# Altium PCB PCB1.PcbDoc
Units mil, origin at the board's own origin, x right, y up, seen from the top; angles counter-clockwise.
Board outline 6000 x 4000 mil, 2 copper layers (Top Layer, Bottom Layer); 60 components, 62 nets, 237 pads, 6 vias.
Unrouted connection lines stored in the file: 5.
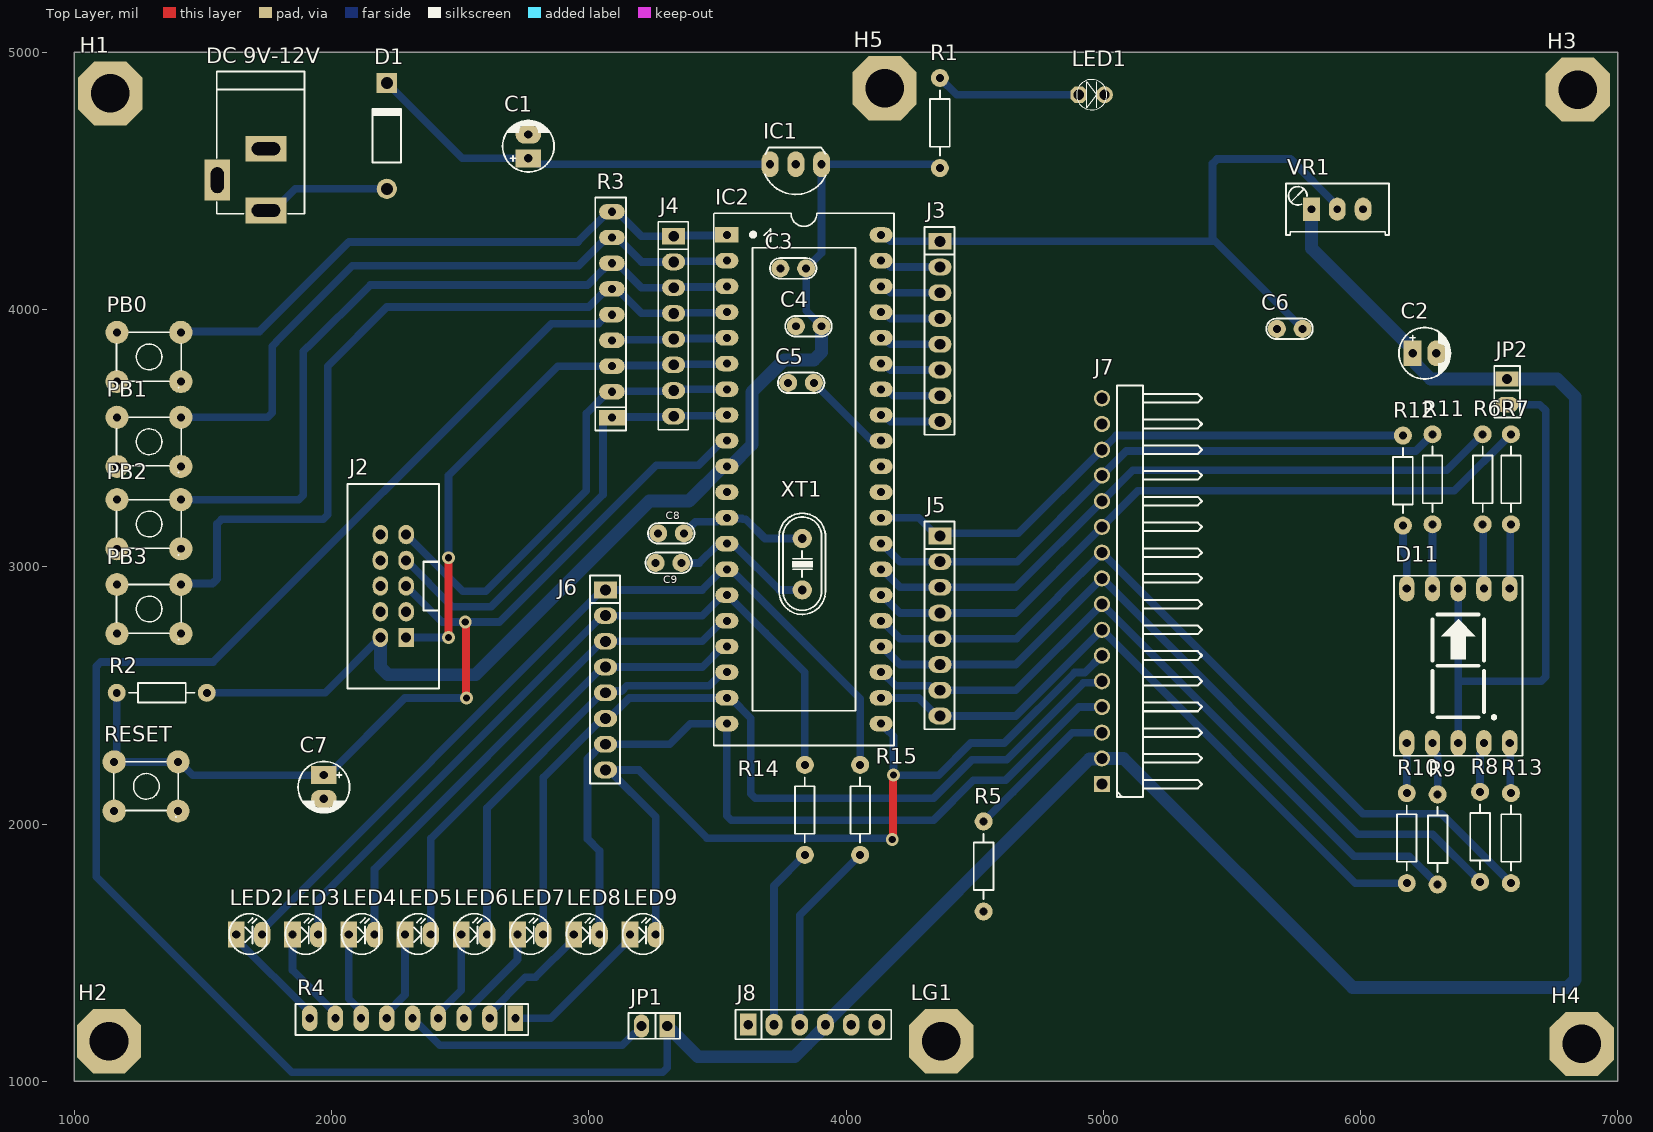
[diagram p0: Top Layer view]
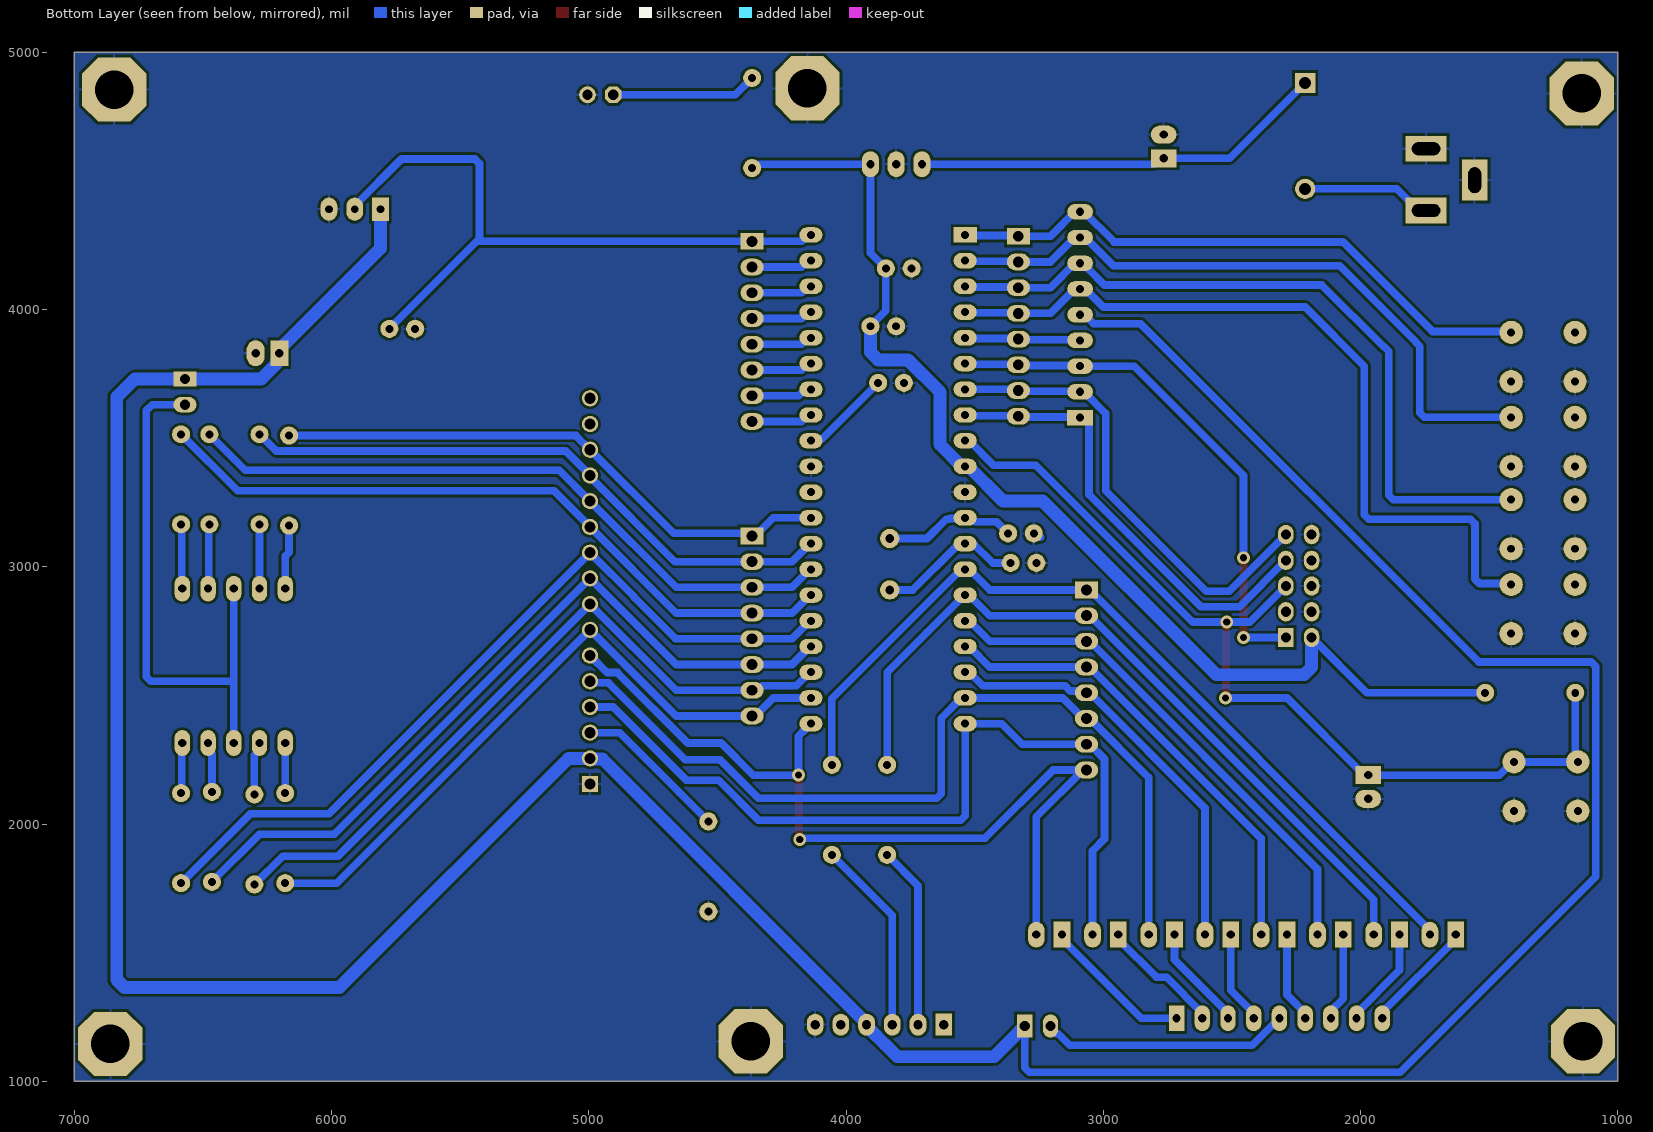
[diagram p1: Bottom Layer view, seen from below]
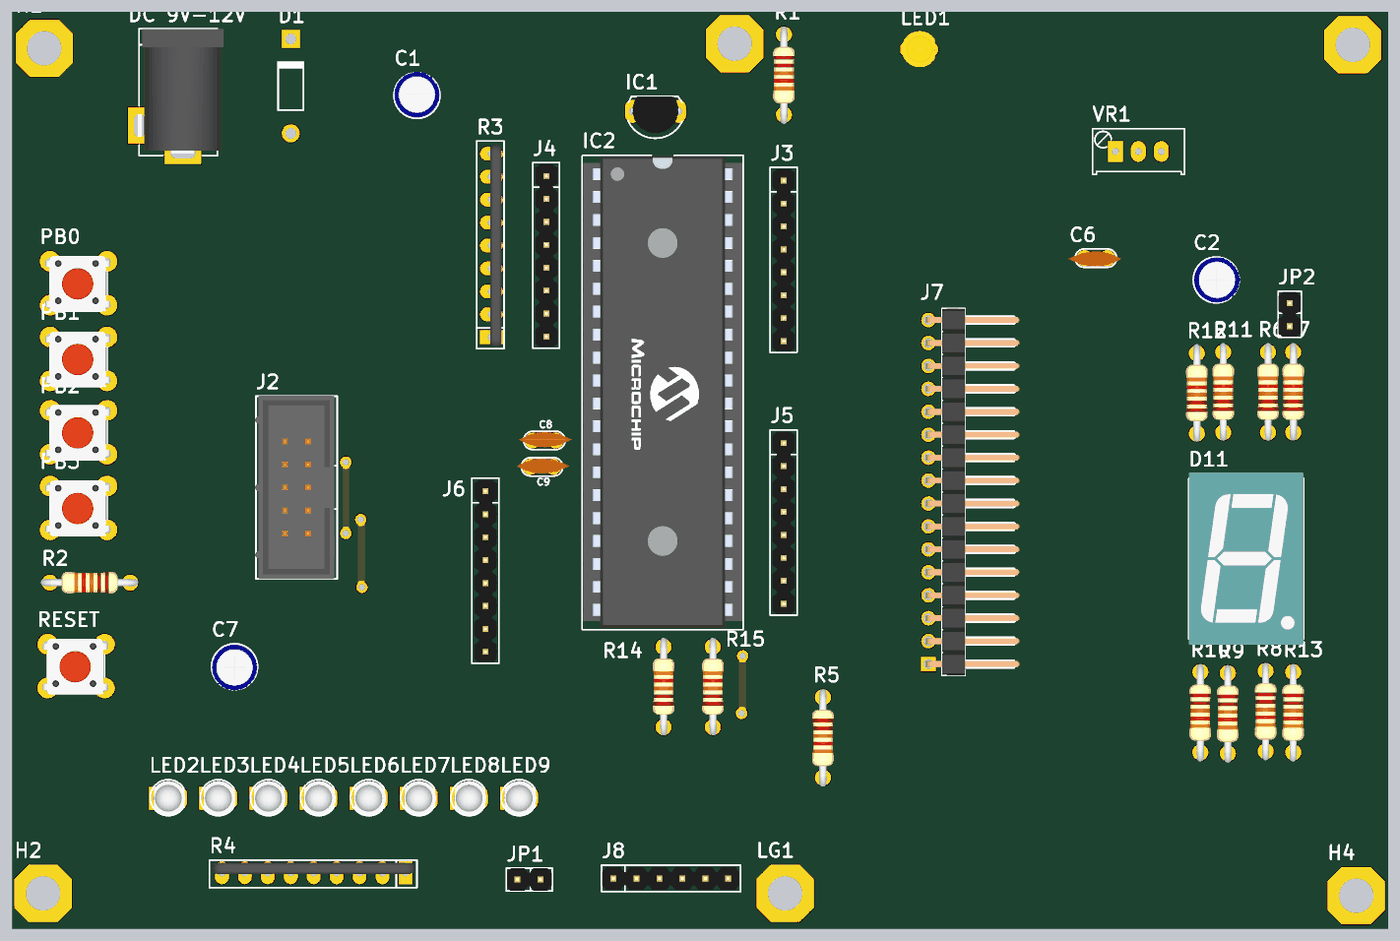
[diagram p2: 3D render of the assembled board from above, using the file's embedded part models]

## Layer stack, top to bottom
Top Solder: solder mask 0.4, Solder Resist, Dk 3.5
Top Layer: signal copper 1.4
Dielectric 1: dielectric 12.6, FR-4, Dk 4.8
Bottom Layer: signal copper 1.4
Bottom Solder: solder mask 0.4, Solder Resist, Dk 3.5

## Board outline
1000,1000 7000,1000 7000,5000 1000,5000

## Design rules (kind name [scope] priority, off if disabled: settings)
Clearance [All] p1: gap=10 ignorepadtopadclearanceinfootprint=FALSE except(0: Arc-Hole Track-Hole SMDPad-Hole THPad-Hole Via-Hole Fill-Hole Poly-Hole Region-Hole Text-Hole)
PolygonConnect [All] p1: connectstyle=Relief reliefconductorwidth=10 reliefentries=4 polygonreliefangle="90 Angle" airgapwidth=10
RoutingVias [All] p1: holewidth=0.4 width=0.8 viastyle="Through Hole" minholewidth=0.4 minwidth=0.8 maxholewidth=0.4 maxwidth=0.8
SolderMaskExpansion [All] p1: expansion=4 istentingtop=FALSE
Width [All] p1: maxlimit=50 minlimit=10 preferedwidth=30 minimp=50.000000 maximp=50.000000 favimp=50.000000
30 further rules are at their usual default settings.

## Components (designator, comment, footprint, x,y, rotation, side; value= is the part's Value field where it differs from the comment)
C1 "1000u" CP1/2 2765,4587.87 r90 top value=10uF/50V
C2 "1000u" CP1/2 6202.87,3830 r0 top value=10uF/50V
C3 "100n" CN1 3845,4160 r180 top value=100pF
C4 "100n" CN1 3905,3935 r180 top value=100pF
C5 "100p" CN1 3775,3715 r0 top value=100pF
C6 "100n" CN1 5775,3925 r180 top value=100pF
C7 "10uF" CP1/2 1970,2190 r270 top value=10uF/50V
C8 "22p" CN1 3270,3130 r0 top value=100pF
C9 "22p" CN1 3260,3015 r0 top value=100pF
D1 "1N4007" DO-41 2215,4675 r90 top
D11 "7SEG S" 7SEGS 6180,2315 r0 top value="LED 7S SEG"
"DC 9V-12V" "Jack DC 12V" DC-IN 1745,4625 r270 top
H1 "1" VIT 1140,4840 r0 top
H2 "1" VIT 1135,1155 r0 top
H3 "1" VIT 6845,4855 r0 top
H4 "1" VIT 6860,1145 r0 top
H5 "1" VIT 4150,4860 r0 top
IC1 "LM7805" 78l05 3805,4565 r180 top
IC2 "ATMEL 16L" DIP40/W0.6 3536.56,4290 r270 top value="Atmega 16L"
J2 "Prog." ISP 2290,2725 r270 top
J3 "PA" JP8 4365,4265 r270 top value=JP7
J4 "PB" JP8 3330,4285 r270 top value=JP7
J5 "PC" JP8 4365,3120 r270 top value=JP7
J6 "PD" JP8 3065,2910 r270 top value=JP7
J7 "JP16" JP16-D1C 5095,3705 r90 top
J8 "JP6" JP6 3620,1220 r0 top value=JP7
JP1 "Jumper 2" JP2 3305,1215 r180 top value="JP 2"
JP2 "Jumper 2" JP2 6570,3730 r270 top value="JP 2"
LED1 "LED" LED-3MM-YELLOW 4905,4835 r0 top value="LED 3 ly Single Colour"
LED2 "LED" LED-3 1680,1570 r0 top value="LED 3 ly Single Colour"
LED3 "LED" LED-3 1898.57,1570 r0 top value="LED 3 ly Single Colour"
LED4 "LED" LED-3 2117.14,1570 r0 top value="LED 3 ly Single Colour"
LED5 "LED" LED-3 2335.71,1570 r0 top value="LED 3 ly Single Colour"
LED6 "LED" LED-3 2554.29,1570 r0 top value="LED 3 ly Single Colour"
LED7 "LED" LED-3 2772.86,1570 r0 top value="LED 3 ly Single Colour"
LED8 "LED" LED-3 2991.43,1570 r0 top value="LED 3 ly Single Colour"
LED9 "LED" LED-3 3210,1570 r0 top value="LED 3 ly Single Colour"
LG1 "1" VIT 4370,1155 r0 top
PB0 "B1" SW4 1290,3815 r0 top value="Button chip 4 pin"
PB1 "B2" SW4 1290,3485 r0 top value="Button chip 4 pin"
PB2 "B3" SW4 1290,3165 r0 top value="Button chip 4 pin"
PB3 "B4" SW4 1290,2835 r0 top value="Button chip 4 pin"
R1 "1k" R1/4W 4365,4550 r90 top value="R1/4W - 1K"
R2 "10k" R1/4W 1165,2510 r0 top value="R1/4W - 1K"
R3 "10k" RN8 3090,3580 r90 top value=10K
R4 "1k" RN8 2715,1245 r180 top value=10K
R5 "1k" R1/4W 4535,1660 r90 top value="R1/4W - 1K"
R6 "1k" R1/4W 6475,3515 r270 top value="R1/4W - 1K"
R7 "1k" R1/4W 6585,3515 r270 top value="R1/4W - 1K"
R8 "1k" R1/4W 6465,1775 r90 top value="R1/4W - 1K"
R9 "1k" R1/4W 6300,1765 r90 top value="R1/4W - 1K"
R10 "1k" R1/4W 6180,1770 r90 top value="R1/4W - 1K"
R11 "1k" R1/4W 6280,3515 r270 top value="R1/4W - 1K"
R12 "1k" R1/4W 6165,3510 r270 top value="R1/4W - 1K"
R13 "1k" R1/4W 6585,1770 r90 top value="R1/4W - 1K"
R14 "100" R1/4W 3840,2230 r270 top value="R1/4W - 1K"
R15 "100" R1/4W 4055,2230 r270 top value="R1/4W - 1K"
RESET "Reset" SW4 1279.12,2145.44 r0 top value="Button chip 4 pin"
VR1 "50K" VR-S3 5810,4390 r0 top value="Volume 50k"
XT1 "10Mhz" XT2 3830,3010 r270 top value=4Mhz

## Footprints (in the part's own frame and the unit in brackets; to place one, negate y for a bottom-side part, rotate by r counter-clockwise, add the part's x,y. Pads: shape width x height; smd on the part's side, far side on the other; paste and mask are expansions set on the pad)
7SEGS [mil] "DIP 10 Leads; Body 12 x 15 mm; Pitch 0.5 mm"
  oval 60x100 hole 32: 1(0,0) 2(100,0) 3(200,0) 4(300,0) 5(400,0) 6(400,600) 7(300,600) 8(200,600) 9(100,600) 10(0,600)
  silkscreen extent -50,-50 450,650, body extent -50,-75 450,675, height 316
78l05 [mil]
  oval 66x100 hole 32: 1(100,0) 2(0,0) 3(-100,0)
  silkscreen extent -117,-65 120,118, body extent -109,-66 109,95, height 245
CN1 [mil]
  round 70 hole 31: 1(0,0) 2(100,0)
  silkscreen extent -40,-40 141,40, body extent -60,-30 170,37, height 265
CP1/2 [mil] "Tu hoa < 22uF/16>50V"
  rect 70x100 hole 32: 1(0,0)
  oval 70x100 hole 32: 2(92.13,0)
  silkscreen extent -53,-100 146,100, body extent -49,-99 149,99, height 287
DC-IN [mil] "Jac DC input"
  rect 100x160 hole 50 slot 110.24 at 90 deg: 1(240.16,0) 2(0,0)
  rect 160x100 hole 50 slot 100 at 0 deg: 3(122.05,-188.98)
  silkscreen extent -300,-191 253,150, body extent -299,-198 245,176, height 434
DIP40/W0.6 [mil] "40 PIN, W 600mil, Pin to pin 100mil"
  rect 60x90 hole 31: 1(0,0)
  oval 60x90 hole 31: 2(100,0) 3(200,0) 4(300,0) 5(400,0) 6(500,0) 7(600,0) 8(700,0) 9(800,0) 10(900,0) 11(1000,0) 12(1100,0) 13(1200,0) 14(1300,0) 15(1400,0) 16(1500,0) 17(1600,0) 18(1700,0) 19(1800,0) 20(1900,0) 21(1900,600) 22(1800,600) 23(1700,600) 24(1600,600) 25(1500,600) 26(1400,600) 27(1300,600) 28(1200,600) 29(1100,600) 30(1000,600) 31(900,600) 32(800,600) 33(700,600) 34(600,600) 35(500,600) 36(400,600) 37(300,600) 38(200,600) 39(100,600) 40(0,600)
  silkscreen extent -84,-51 1985,650, body extent -80,-47 1977,646, height 327
DO-41 [mm] "Diode, Axial; Body 5.2 x 2.7 mm (LxDia. max), Lead Dia. 0.86 mm (max)"
  round 2 hole 1.2: 1(-5.23,0)
  rect 2x2 hole 1.2: 2(5.23,0)
  silkscreen extent -2.65,-1.4 2.75,1.4
ISP [mil]
  rect 75x60 hole 39.37 mask+8: 1(0,0)
  oval 75x60 hole 39.37 mask+8: 2(0,-100) 3(-100,0) 4(-100,-100) 5(-200,0) 6(-200,-100) 7(-300,0) 8(-300,-100) 9(-400,0) 10(-400,-100)
  silkscreen extent -598,-227 198,127, body extent -600,-231 200,117, height 363
JP2 [mil]
  rect 60x90 hole 39.37: 1(0,0)
  oval 60x90 hole 39.37: 2(100,0)
  silkscreen extent -50,-50 150,50, body extent -48,-50 148,48, height 323
JP6 [mil] "JP6"
  rect 65x85 hole 36: 1(0,0)
  oval 65x85 hole 36: 2(100,0) 3(200,0) 4(300,0) 5(400,0) 6(500,0)
  silkscreen extent -50,-57 556,58, body extent -48,-50 548,48, height 323
JP8 [mil] "JP8"
  rect 65x90 hole 42: 1(0,0)
  oval 65x90 hole 42: 2(100,0) 3(200,0) 4(300,0) 5(400,0) 6(500,0) 7(600,0) 8(700,0)
  silkscreen extent -56,-60 752,57, body extent -48,-50 748,48, height 323
JP16-D1C [mm] "16 pins, 1 row, right angled, gold plating"
  rect 1.6x1.6 hole 1.1: 1(-39.37,2.54)
  round 1.6 hole 1.1: 2(-36.83,2.54) 3(-34.29,2.54) 4(-31.75,2.54) 5(-29.21,2.54) 6(-26.67,2.54) 7(-24.13,2.54) 8(-21.59,2.54) 9(-19.05,2.54) 10(-16.51,2.54) 11(-13.97,2.54) 12(-11.43,2.54) 13(-8.89,2.54) 14(-6.35,2.54) 15(-3.81,2.54) 16(-1.27,2.54)
  silkscreen extent -40.64,-7.34 0,1.04, body extent -40.64,-7.52 0,2.84, height 2.55
LED-3 [mil] "LED 2 PIN, 3ly Only colour"
  rect 65x100 hole 32: 1(-50,0)
  oval 65x100 hole 32: 2(50,0)
  silkscreen extent -78,-76 69,81, body extent -62,-75 76,75, height 217
LED-3MM-YELLOW [mil]
  oct 65x65 hole 40: 1(0,0)
  round 65 hole 40: 2(100,0)
  silkscreen extent -9,-59 109,59, body extent -27,-77 117,80, height 181
R1/4W [mil] "R 1/4W, 2 Pin, 350mil"
  round 70 hole 31: 1(0,0) 2(350,0)
  silkscreen extent 48,-38 302,38, body extent -40,-47 386,47, height 111
RN8 [mil] "R SIP8, 9 Pin"
  rect 60x100 hole 32: 1(0,0)
  oval 60x100 hole 32: 2(100,0) 3(200,0) 4(300,0) 5(400,0) 6(500,0) 7(600,0) 8(700,0) 9(800,0)
  silkscreen extent -50,-55 855,65, body extent -43,-44 843,5, height 259
SW4 [mil] "SW button 4pin, 250 x250 mil"
  round 90 hole 31: 1(-124,-95) 2(124,96) 3(124,-95) 4(-124,96)
  silkscreen extent -126,-119 125,96, body extent -160,-124 152,120, height 276
VIT [mil] "VIT"
  oct 250x250 hole 150: VIT1(0,0)
VR-S3 [mil] "Variable Resistor"
  rect 65x90 hole 30: 1(0,0)
  oval 65x90 hole 30: 2(100,0) 3(200,0)
  silkscreen extent -100,-100 301,100, body extent -91,-98 291,90, height 430
XT2 [mil] "Footpin for Crystal 2 pin"
  round 75 hole 34: 1(-100,0) 2(100,0)
  silkscreen extent -198,-90 195,90, body extent -233,-93 213,90, height 138

## Part data
C1 C2 C7: library part CP1, "Cap P  0,1uF < 22uF , 16 - 50V", Description 1="10 => 220uF/6,3V/10V - 10uF => 100uF/16V", Description 2="0,1uF => 33uF/50V - 10uF => 22uF/63V", Description 3="0,47uF => 10uF/100V"
C3 C4 C5 C6 C8 C9: library part CN1, "Cap np  1pF - 472pF"
D1: library part "Diode 1N4007", "1 Amp General Purpose Rectifier", Code_JEDEC=DO-204-AL, ComponentLink1Description="Manufacturer Link", ComponentLink1URL=http://www.fairchildsemi.com/, ComponentLink2Description=Datasheet, ComponentLink2URL=http://www.fairchildsemi.com/ds/1N%2F1N4001.pdf, DatasheetVersion=1998, LatestRevisionDate=17-Jul-2002, LatestRevisionNote="Re-released for DXP Platform.", PackageDescription="Diode, Axial; Body 5.2 x 2.7 mm (LxDia. max), Lead Dia. 0.86 mm (max)", PackageReference=DO-41, PackageVersion=Aug-1999, Published=8-Jun-2000, Publisher="Altium Limited"
D11: library part LED7S, "Single 7 Seg Dipslay"
"DC 9V-12V": library part Jac_DC, "Cắm", Chung_Loai=Cắm, Don_Vi=Con, Ma_Hang=MH000923, Ten_Linh_Kien="Jack DC5.5x2.1MM DC5501"
H1 H2 H3 H4 H5 LG1: library part VIT, "Oc Vit"
IC1: library part LM78xx, "On ap +, from + 5 to + 24VDC"
IC2: library part Atmega16L, "8-Bit AVR Microcontroller with 16K Bytes of In-System Programmable Flash Memory"
J2: library part ISP
J3 J4 J5 J6: library part JP8, "JP8 PIN"
J7: "WR-PHD 2.54 mm Angled Socket Header", Manufacturer="W¨¹rth Elektronik eiSos GmbH", partNo=613016143121, ComponentLink1 Description=Manufacturer, ComponentLink1URL=http://www.we-online.com, ComponentLink2 Description=Datasheet, ComponentLink2URL=http://katalog.we-online.de/em/datasheet/6130xx143121.pdf, Created by="Karrer Zheng", Created Date="29 March 2013", NoPins=16
J8: "JP6 PIN"
JP1 JP2: library part "JP 2"
LED1 LED2 LED3 LED4 LED5 LED6 LED7 LED8 LED9: "LED Single colour Green and Red"
PB0 PB1 PB2 PB3 RESET: library part SW4, "Switch button 4 pin"
R1 R2 R5 R6 R7 R8 R9 R10 R11 R12 R13 R14 R15: library part R1/4W, "Resistor 1/4W"
R3 R4: library part RKC8LD, "Resistor Pack 4x2"
VR1: library part VR-S, "Var Resistor"
XT1: library part XT2, "Crystal For all Crystal 2pin."

## Via types
v1: diameter 50, hole 28, Top Layer to Bottom Layer, 6 vias

## Nets (pads, with @x,y where several pads share a name; then routed paths per layer and width w, separated by ;. In a path a pad name is that pad's centre, name@x,y a point inside that pad or via, vN(x,y) a via of type N, cw(c..) or ccw(c..) an arc to the next point about the centre after c; other vN are vias at no path point)
AVR_RX: IC2.14 J6.1 LED2.2 R15.1 | length 3388.5
  Bottom Layer w30: LED2.2 1730,1587.5 3052.5,2910 J6.1 3441.56,2910 3521.56,2990 IC2.14 3551.56,2990 4055,2486.56 R15.1
AVR_TX: IC2.15 J6.2 LED3.2 R14.1 | length 3002.2
  Bottom Layer w30: LED3.2 1948.57,1706.07 3052.5,2810 J6.2 3441.56,2810 3521.56,2890 IC2.15 3540,2890 3687.87,2742.13 3840,2590 R14.1
GND: "DC 9V-12V.2" "DC 9V-12V.3" C1.2 C2.2 C3.2 C4.2 C5.1 C6.2 C7.2 C8.1 C9.1 H1.VIT1 H2.VIT1 H3.VIT1 H4.VIT1 H5.VIT1 IC1.2 IC2.11 IC2.31 J2.4 J2.6 J2.8 J2.10 J7.1 J8.6 LED1.2 LG1.VIT1 PB0.1 PB0.3 PB1.1 PB1.3 PB2.1 PB2.3 PB3.1 PB3.3 R5.1 RESET.1 RESET.3 VR1.3 | length 82.4
  Bottom Layer w30: PB2.3 PB2.3@1419,3065 ; J2.10 J2.10@2190,3132.5 ; C8.1@3244.18,3115 3259.18,3130 C8.1 ; C5.1 C5.1@3775,3725.82 ; J8.6 J8.6@4120,1237.5 ; R5.1@4535,1652.5 R5.1
MISO: IC2.7 J2.9 J4.7 R3.2 | length 1827.3
  Bottom Layer w30: J2.9 2510,2905 2600,2905 2990,3295 2990,3595.42 3074.58,3680 R3.2 3092.5,3682.5 3327.5,3682.5 3335,3690 IC2.7@3525,3690
MOSI: IC2.6 J2.1 J4.6 R3.3 | length 2066.7
  Top Layer w30: v1(2455,2725) v1(2455,3035)
  Bottom Layer w30: J2.1 v1(2455,2725) ; v1(2455,3035) 2455,3355 2880,3780 R3.3 3092.5,3782.5 3327.5,3782.5 J4.6 3332.5,3787.5 3515,3787.5 3534.06,3787.5 IC2.6 ; IC2.6@3515,3790 IC2.6@3525,3790
NetC1_1: C1.1 D1.2 IC1.1 | length 1620.9
  Bottom Layer w30: D1.2 2508.03,4587.87 C1.1 2780,4587.87 2802.87,4565 IC1.1
NetC5_2: C5.2 IC2.32 | length 354.8
  Bottom Layer w30: C5.2 4094.26,3495.74 4130.82,3495.74 IC2.32
NetC8_2: C8.2 IC2.12 XT1.1 | length 500
  Bottom Layer w30: C8.2 3415,3175 3498.44,3175 3513.44,3190 IC2.12 ; IC2.12@3553.65,3187.91 3595.53,3187.91 3598.44,3185 3610,3185 3685,3110 XT1.1
NetC9_2: C9.2 IC2.13 XT1.2 | length 575.6
  Bottom Layer w30: C9.2 3430,3015 3499.26,3084.26 3530.82,3084.26 IC2.13 3559.68,3090 3574.68,3075 3575,3075 3740,2910 XT1.2
NetD1_1: "DC 9V-12V.1" D1.1 | length 504.9
  Bottom Layer w30: 1745,4384.84 1775,4384.84 1859.25,4469.09 D1.1
NetD11_1: D11.1 R10.2 | length 195
  Bottom Layer w30: R10.2 D11.1
NetD11_2: D11.2 R9.2 | length 208.3
  Bottom Layer w30: D11.2 6280,2286.88 6300,2266.88 R9.2
NetD11_3: D11.3 D11.8 JP2.2 | length 2141.5
  Bottom Layer w30: D11.3 6380,2555 ; D11.8 6380,2555 ; JP2.2 6697.43,3630 6720,3607.43 6720,2572.57 6702.43,2555 6380,2555
NetD11_4: D11.4 R8.2 | length 196.2
  Bottom Layer w30: R8.2 6465,2271.88 6480,2286.88 D11.4
NetD11_5: D11.5 R13.2 | length 197.1
  Bottom Layer w30: D11.5 6582.5,2312.5 6582.5,2122.5 R13.2
NetD11_6: D11.6 R7.2 | length 252.1
  Bottom Layer w30: D11.6 6582.5,2917.5 6582.5,3162.5 R7.2
NetD11_7: D11.7 R6.2 | length 252.1
  Bottom Layer w30: R6.2 6477.5,3162.5 6477.5,2917.5 D11.7
NetD11_9: D11.9 R11.2 | length 250
  Bottom Layer w30: D11.9 R11.2
NetD11_10: D11.10 R12.2 | length 251.2
  Bottom Layer w30: R12.2 6165,3056.52 6180,3041.52 D11.10
NetJ7_3: J7.3 R5.2 | length 602.9
  Bottom Layer w30: R5.2 4649.64,2124.64 4660,2135 4880,2355 J7.3
NetJ8_2: J8.2 R14.2 | length 709.7
  Bottom Layer w30: J8.2 3720,1760 R14.2
NetJ8_3: J8.3 R15.2 | length 757.3
  Bottom Layer w30: J8.3 3820,1645 R15.2
NetJP1_2: JP1.2 R4.5 | length 975.7
  Bottom Layer w30: R4.5 2315,1233.12 2328.86,1219.26 2340.74,1219.26 2420.18,1139.82 3129.82,1139.82 3175,1185 3181.88,1185 3205,1208.12 JP1.2
NetLED1_1: LED1.1 R1.2 | length 566.9
  Bottom Layer w30: R1.2 4430,4835 LED1.1
NetLED2_1: LED2.1 R4.9 | length 443.1
  Bottom Layer w30: LED2.1 1630,1552.5 1915,1267.5 R4.9
NetLED3_1: LED3.1 R4.8 | length 393.9
  Bottom Layer w30: LED3.1 1848.57,1431.43 2015,1265 R4.8
NetLED4_1: LED4.1 R4.7 | length 344.8
  Bottom Layer w30: LED4.1 2067.14,1320.98 2115,1273.12 R4.7
NetLED5_1: LED5.1 R4.6 | length 354.3
  Bottom Layer w30: R4.6 2215,1265 2285.71,1335.71 LED5.1
NetLED6_1: LED6.1 R4.4 | length 362
  Bottom Layer w30: R4.4 2415,1265 2504.29,1354.29 LED6.1
NetLED7_1: LED7.1 R4.3 | length 411.1
  Bottom Layer w30: R4.3 2515,1265 2722.86,1472.86 LED7.1
NetLED8_1: LED8.1 R4.2 | length 483
  Bottom Layer w30: R4.2 2615,1265 2753.74,1403.74 2792.67,1403.74 2941.43,1552.5 LED8.1
NetLED9_1: LED9.1 R4.1 | length 589.9
  Bottom Layer w30: R4.1 2852.5,1245 3160,1552.5 LED9.1
PA0: C6.1 IC2.40 J3.1 VR1.2 | length 2699.2
  Bottom Layer w30: IC2.40@4125,4290 4148.12,4290 4173.12,4265 J3.1 5435,4265 ; C6.1@5775,3935.82 C6.1 5435,4265 ; VR1.2 5910,4402.86 5727.86,4585 5442.57,4585 5425,4567.43 5425,4275 5435,4265
PA1: IC2.39 J3.2 | length 250.4
  Bottom Layer w30: IC2.39@4125,4190 4148.12,4190 4173.12,4165 J3.2
PA2: IC2.38 J3.3 | length 250.4
  Bottom Layer w30: IC2.38@4125,4090 4148.12,4090 4173.12,4065 J3.3
PA3: IC2.37 J3.4 | length 250.4
  Bottom Layer w30: IC2.37@4125,3990 4148.12,3990 4173.12,3965 J3.4
PA4: IC2.36 J3.5 | length 250.4
  Bottom Layer w30: IC2.36@4125,3890 4148.12,3890 4173.12,3865 J3.5
PA5: IC2.35 J3.6 | length 250.4
  Bottom Layer w30: IC2.35@4125,3790 4148.12,3790 4173.12,3765 J3.6
PA6: IC2.34 J3.7 | length 238.8
  Bottom Layer w30: IC2.34 4159.13,3690 4184.13,3665 J3.7
PA7: IC2.33 J3.8 | length 250.4
  Bottom Layer w30: IC2.33@4125,3590 4148.12,3590 4173.12,3565 J3.8
PB0: IC2.1 J4.1 PB0.2 PB0.4 R3.9 | length 2358.2
  Bottom Layer w30: PB0.2 1418,3915 1720,3915 2067.83,4262.83 2957.83,4262.83 3075,4380 3110,4380 3205,4285 J4.1 3332.5,4287.5 3534.06,4287.5 IC2.1
PB1: IC2.2 J4.2 PB1.2 PB1.4 R3.8 | length 2629.8
  Bottom Layer w30: PB1.2 1752.43,3581 1770,3598.57 1770,3857.43 1785,3872.43 1785,3875 2080,4170 2960,4170 3070,4280 R3.8 3110,4280 3205,4185 J4.2 3332.5,4187.5 3501.88,4187.5 3534.06,4187.5 IC2.2 ; IC2.2@3501.88,4190 IC2.2@3525,4190
PB2: IC2.3 J4.3 PB2.2 PB2.4 R3.7 | length 2873.1
  Bottom Layer w30: PB2.2 1872.43,3261 1890,3278.57 1890,3837.43 1907.57,3855 1910,3855 2150,4095 2995,4095 3055,4155 3055,4156.88 3078.12,4180 3110,4180 3205,4085 J4.3 3332.5,4087.5 3534.06,4087.5 IC2.3
PB3: IC2.4 J4.4 PB3.2 PB3.4 R3.6 | length 3104
  Bottom Layer w30: PB3.2 1418,2935 1537.43,2935 1555,2952.57 1555,3167.43 1572.57,3185 1967.43,3185 1985,3202.57 1985,3780 2215,4010 3000,4010 3070,4080 3110,4080 3205,3985 J4.4 3332.5,3987.5 3534.06,3987.5 IC2.4
PB4: IC2.5 J4.5 R3.4 | length 460.7
  Bottom Layer w30: R3.4 3092.5,3882.5 3327.5,3882.5 J4.5 3332.5,3887.5 3515,3887.5 3534.06,3887.5 IC2.5 ; IC2.5@3515,3890 IC2.5@3525,3890
PC0: IC2.22 J5.8 J7.7 R10.1 | length 2630.8
  Bottom Layer w30: IC2.22@4125,2490 4282.5,2490 4352.5,2420 J5.8 4660,2420 J7.7 5980,1770 R10.1
PC1: IC2.23 J5.7 J7.8 R9.1 | length 2794.2
  Bottom Layer w30: IC2.23@4125,2590 4140,2590 4193.03,2536.97 4326.06,2536.97 4343.03,2520 J5.7 4660,2520 J7.8 5975,1875 6190,1875 R9.1
PC2: IC2.24 J5.6 J7.9 R8.1 | length 2996.5
  Bottom Layer w30: IC2.24@4125,2690 4140,2690 4210,2620 J5.6 4660,2620 J7.9 5990,1960 6280,1960 R8.1
PC3: IC2.25 J5.5 J7.10 R13.1 | length 3161.4
  Bottom Layer w30: IC2.25@4125,2790 4140,2790 4210,2720 J5.5 4662.43,2720 4823.32,2880.9 4823.32,2883.32 J7.10 6010,2040 6315,2040 R13.1
PC4: IC2.26 J5.4 J7.11 R7.1 | length 2776.9
  Bottom Layer w30: IC2.26@4125,2890 4140,2890 4210,2820 J5.4 4660,2820 J7.11 5135,3295 6365,3295 R7.1
PC5: IC2.27 J5.3 J7.12 R6.1 | length 2625.5
  Bottom Layer w30: IC2.27@4125,2990 4140,2990 4210,2920 J5.3 4660,2920 J7.12 5115,3375 6335,3375 R6.1
PC6: IC2.28 J5.2 J7.13 R11.1 | length 2392
  Bottom Layer w30: IC2.28@4125,3090 4140,3090 4210,3020 J5.2 4665,3020 4995,3350 J7.13 5090,3450 6215,3450 R11.1
PC7: IC2.29 J5.1 J7.14 R12.1 | length 2230.5
  Bottom Layer w30: IC2.29@4125,3190 4282.5,3190 4352.5,3120 J5.1 4375,3130 4670,3130 J7.14 5050,3510 R12.1
PD2: IC2.16 J6.3 LED4.2 | length 2023.9
  Bottom Layer w30: LED4.2 2167.14,1824.64 3052.5,2710 J6.3 3441.56,2710 3521.56,2790 IC2.16
PD3: IC2.17 J6.4 LED5.2 | length 1833.4
  Bottom Layer w30: LED5.2 2385.71,1943.21 3052.5,2610 J6.4 3441.56,2610 3521.56,2690 IC2.17
PD4: IC2.18 J6.5 LED6.2 | length 1642.9
  Bottom Layer w30: LED6.2 2604.29,2061.79 3052.5,2510 J6.5 3071.7,2516.7 3127.63,2516.7 3147.9,2536.97 3468.53,2536.97 3521.56,2590 IC2.18
PD5: IC2.19 J6.6 J7.5 LED7.2 | length 3433
  Bottom Layer w30: LED7.2 2822.86,2180.36 3052.5,2410 J6.6 3077.5,2410 3157.5,2490 IC2.19 3551.56,2490 3630,2411.56 3630,2117.57 3647.57,2100 4340,2100 4490,2250 4625,2250 4923.69,2548.69 4988.69,2548.69 J7.5
PD6: IC2.20 J6.7 J7.4 LED8.2 | length 3305.6
  Bottom Layer w30: LED8.2 3041.43,1895.53 2995,1941.96 2995,2252.5 3052.5,2310 J6.7 3315,2310 3395,2390 IC2.20 3536.56,2032.57 3554.13,2015 4340,2015 4495,2170 4620,2170 4905,2455 J7.4
PD7: IC2.21 J6.8 J7.6 LED9.2 | length 3421.2
  Top Layer w30: v1(4180,1940) 4182.5,1942.5 4182.5,2187.5 v1(4185,2190)
  Bottom Layer w30: J6.8 J6.8@3077.5,2210 ; LED9.2 3260,2027.5 J6.8@3077.5,2210 ; IC2.21 4143.44,2390 4157.3,2376.14 4157.3,2369.26 4185,2341.56 v1(4185,2190) 4360,2190 4485,2315 4615,2315 4888.69,2588.69 4928.69,2588.69 J7.6 ; v1(4180,1940) 4176.17,1943.83 4162.03,1943.83 4160.86,1945 3460,1945 3195,2210 J6.8@3077.5,2210
RESET: C7.1 IC2.9 J2.5 R2.1 RESET.2 RESET.4 | length 3673.7
  Top Layer w30: v1(2520,2785) 2522.5,2782.5 2522.5,2492.5 v1(2525,2490)
  Bottom Layer w30: RESET.4 RESET.2 ; RESET.4@1161,2241 1165,2245 R2.1 ; RESET.2@1409,2241 1460,2190 C7.1 1985,2190 2285,2490 v1(2525,2490) ; J2.5 2430,2785 v1(2520,2785) 2652.43,2785 3262.43,3395 3426.56,3395 3521.56,3490 IC2.9
SCK: IC2.8 J2.7 J4.8 R3.1 | length 1806.7
  Bottom Layer w30: J2.7 2470,2845 2620,2845 3055,3280 3055,3565 3070,3580 R3.1 3092.5,3582.5 3327.5,3582.5 J4.8 3332.5,3587.5 3534.06,3587.5 IC2.8 ; IC2.8@3515,3590 IC2.8@3525,3590
VCC: C2.1 C3.1 C4.1 IC1.3 IC2.10 J2.2 J7.2 J8.4 JP1.1 JP2.1 R1.1 R2.2 R3.5 VR1.1 | length 18712.9
  Bottom Layer w30: R2.2@1515,2520.82 R2.2 1975,2510 J2.2 ; R3.5 3072.43,3980 3037.43,3945 2855,3945 1540,2630 1102.57,2630 1085,2612.43 1085,1795 1845,1035 3287.43,1035 3305,1052.57 3305,1200 JP1.1 ; IC2.10@3523.99,3390 IC2.10 ; C4.1 3845,3995 C3.1 3905,4220 IC1.3 4339.18,4565 4354.18,4550 R1.1
  Bottom Layer w50: J2.2 2190,2609.29 2219.29,2580 2560,2580 3235,3255 3388.99,3255 IC2.10@3523.99,3390 ; JP1.1@3305,1200 3310,1195 3325,1195 3425,1095 3800,1095 3847.5,1142.5 3847.96,1142.5 3907.96,1202.5 3908.44,1202.5 3920,1214.06 J8.4 ; IC2.10 3550,3390 3635,3475 3635,3680 3759.48,3804.48 3875.71,3804.48 3905,3833.77 C4.1 ; J8.4@3920,1225.94 3931.56,1237.5 3932.04,1237.5 4947.05,2252.51 4992.51,2252.51 J7.2 5078.92,2255 5968.92,1365 6805.71,1365 6835,1394.29 6835,3660 6765,3730 JP2.1 6272.87,3730 6212.87,3790 C2.1@6212.87,3805 ; VR1.1 5810,4237.87 6202.87,3845 C2.1
pads on no net: IC2.30 J2.3 J7.15 J7.16 J8.1 J8.5

## Polygon pours and split planes (outlines as drawn)
GND on Bottom Layer "GND_L02_P000" (solid, pour order 0): 1000,1000 7000,1000 7000,5000 1000,5000

## Silkscreen, mask and mechanical layers (free items; w line width, h text height)
Mechanical 1:
  the board outline again, w30